# Altium PCB AnalExtend.PcbDoc (part 2 of 3)
Units mm, origin at the board's own origin, x right, y up, seen from the top; angles counter-clockwise.
Board outline 190 x 160 mm, 2 copper layers (Top Layer, Bottom Layer), stack 1.536 mm thick; 277 components, 158 nets, 942 pads, 254 vias.
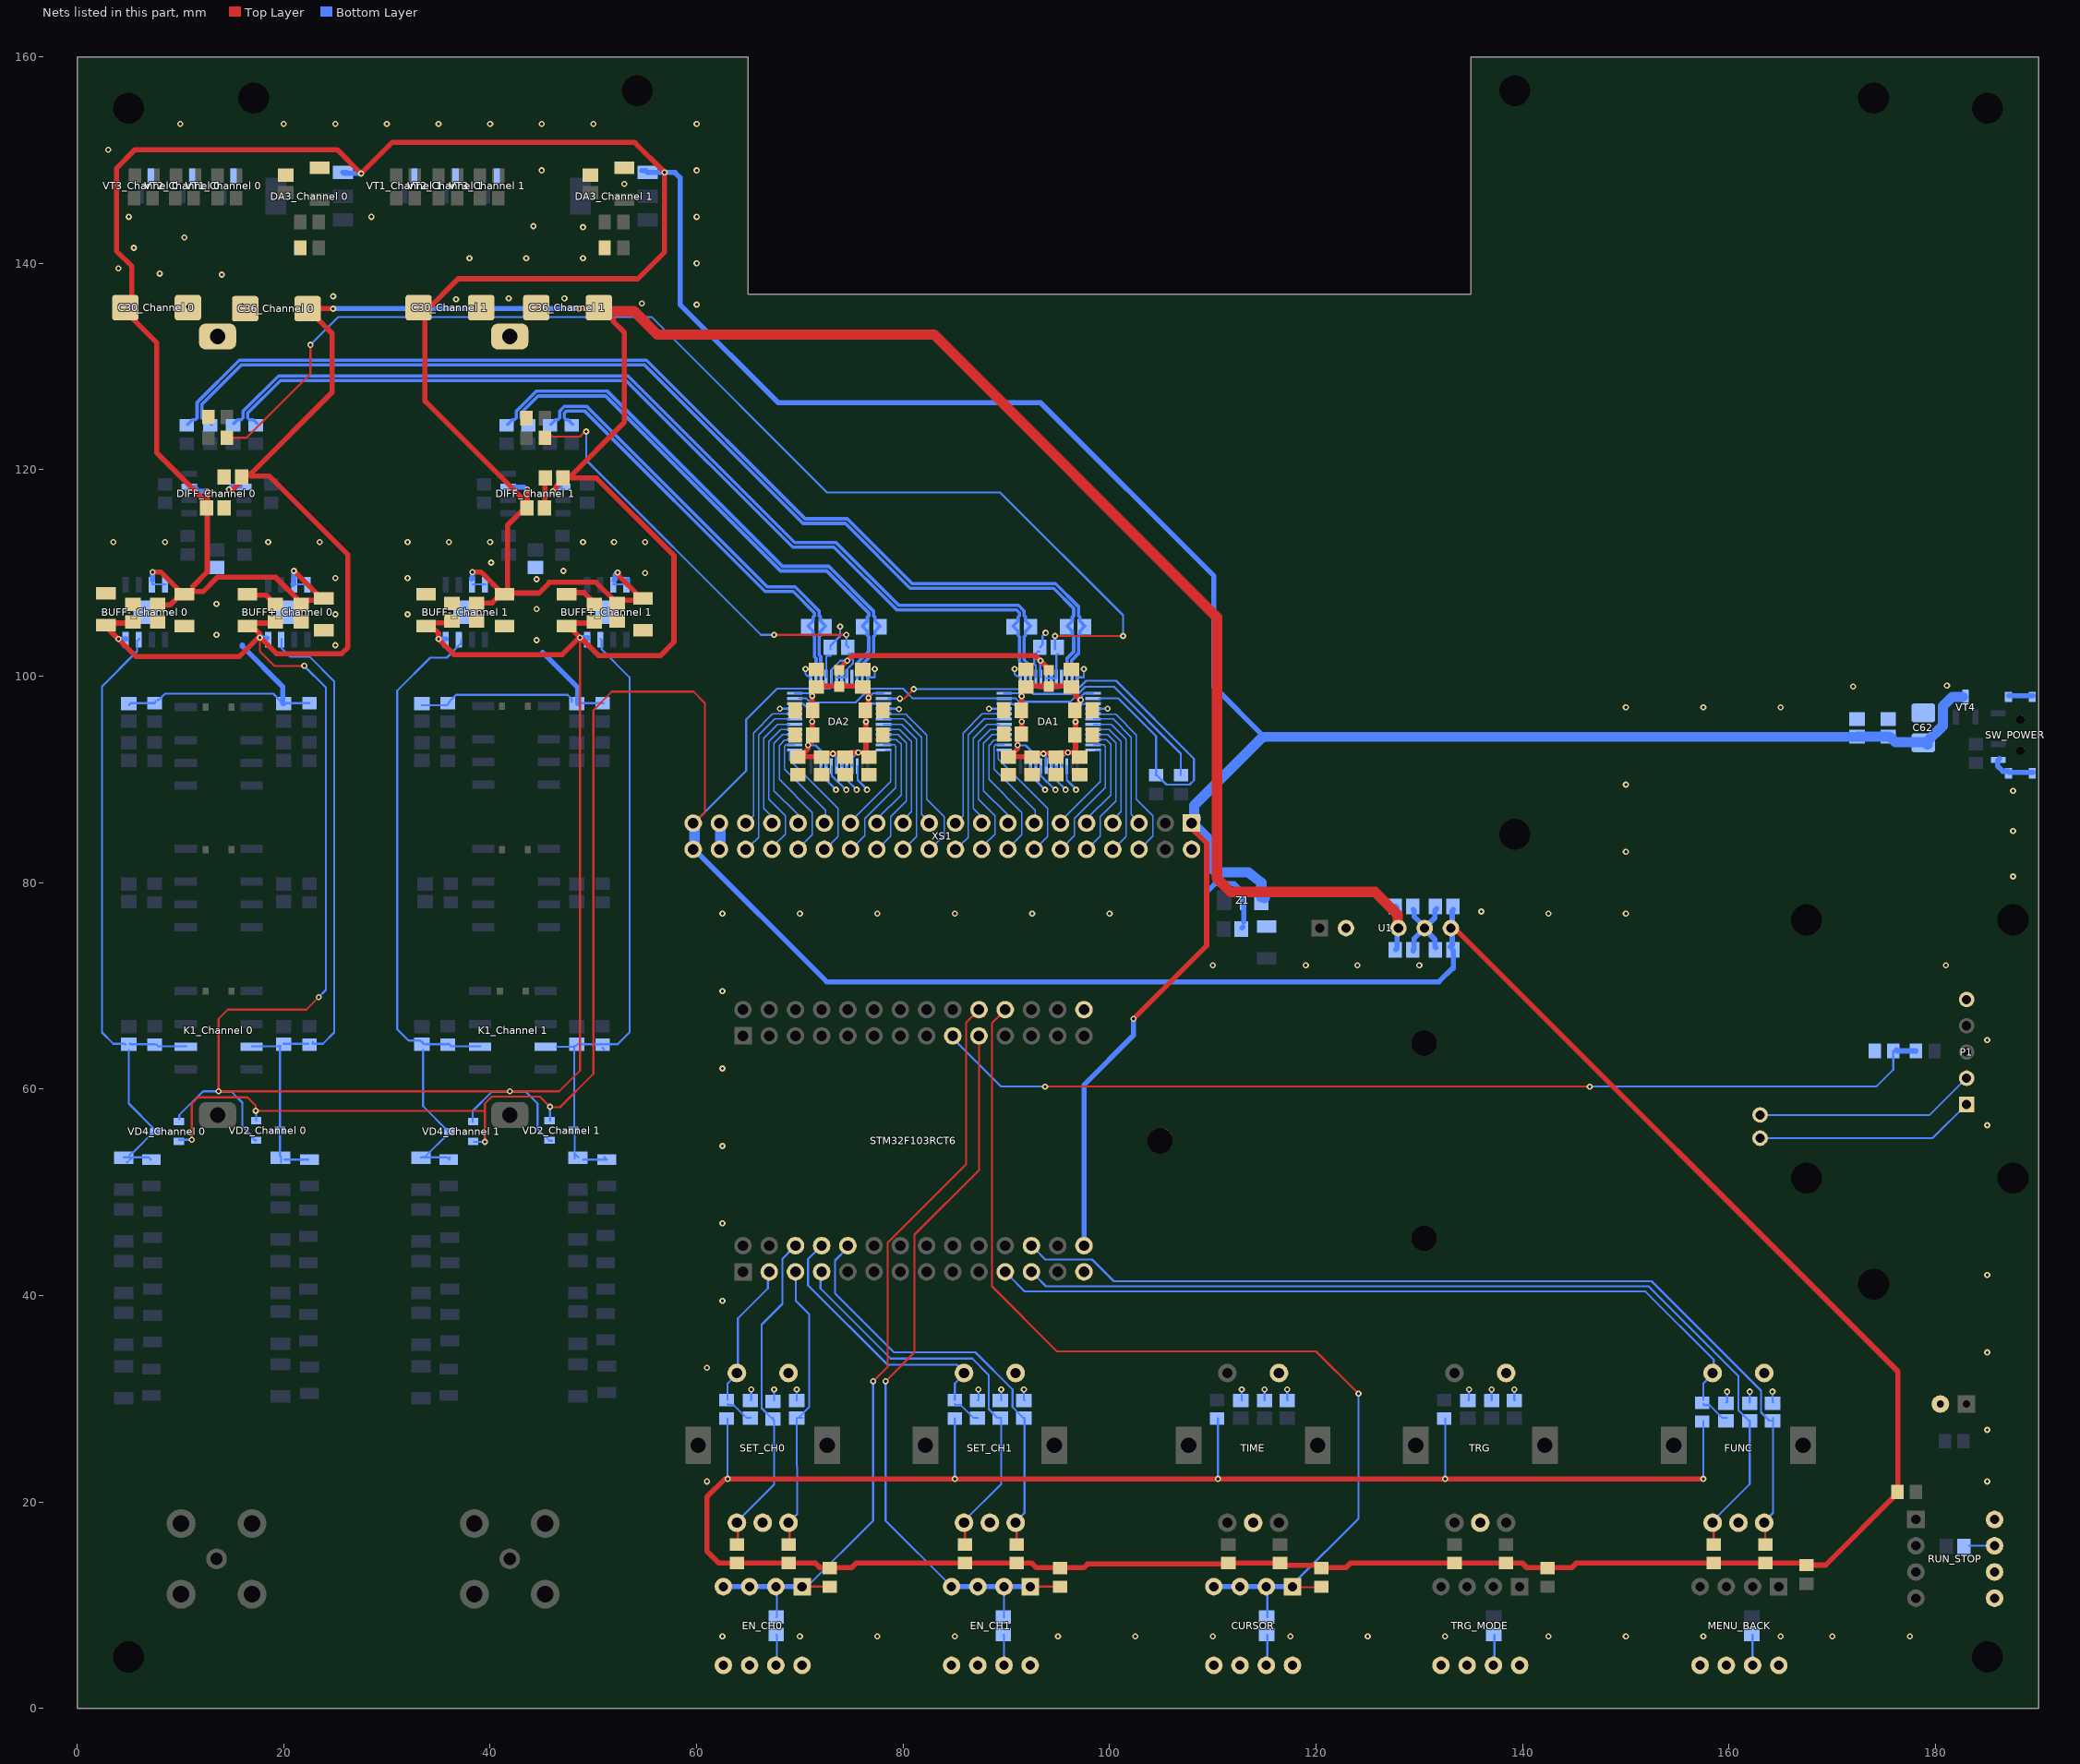
[diagram p2: the nets of this part, all layers, seen from the top]

## Part data
"BNC_Channel 0" "BNC_Channel 1": library part BNC_VERTICAL_THT, "Generic vertical BNC jack, five through-hole terminals"
"BUFF+_Channel 0" "BUFF+_Channel 1" "BUFF-_Channel 0" "BUFF-_Channel 1": "ADI ADA4817-1ARDZ FastFET op amp, RD-8-4 SOIC-8 with EP"
C1 C2 C3 C4 C5 C6 C7 C8 C9 C10 C11 C12 C13 C14 C15 C16 C17 C18 C19 C20 C21 C22 C23 C24 C26 C27 C28 "C29_Channel 0" "C29_Channel 1" "C31_Channel 0" "C31_Channel 1" "C33_Channel 0" "C33_Channel 1" "C35_Channel 0" "C35_Channel 1" "C37_Channel 0" "C37_Channel 1" "C39_Channel 0" "C39_Channel 1" "C41_Channel 0" "C41_Channel 1" "C43_Channel 0" "C43_Channel 1" "C44_Channel 0" "C44_Channel 1" "C50_Channel 0" "C50_Channel 1" "C51_Channel 0" "C51_Channel 1" "C57_Channel 0" "C57_Channel 1" "C58_Channel 0" "C58_Channel 1" "C59_Channel 0" "C59_Channel 1" "C60_Channel 0" "C60_Channel 1" "C61_Channel 0" "C61_Channel 1" C65 C66 C67 C68 C69 C70 C71 C72 C73 C74 C75 C76 C77 C78 C79 C80 C81 C82 C83 C84 C85 "COUTA_Channel 0" "COUTA_Channel 1" "COUTB_Channel 0" "COUTB_Channel 1": library part CAPC2012(0805), Package=0805, Part Number=CAPC2012(0805)
C25 "C32_Channel 0" "C32_Channel 1" "C34_Channel 0" "C34_Channel 1" "C38_Channel 0" "C38_Channel 1" "C40_Channel 0" "C40_Channel 1" "C42_Channel 0" "C42_Channel 1" "C45_Channel 0" "C45_Channel 1" "C46_Channel 0" "C46_Channel 1" "C47_Channel 0" "C47_Channel 1" "C48_Channel 0" "C48_Channel 1" "C49_Channel 0" "C49_Channel 1" "C52_Channel 0" "C52_Channel 1" "C53_Channel 0" "C53_Channel 1" "C54_Channel 0" "C54_Channel 1" "C55_Channel 0" "C55_Channel 1" "C56_Channel 0" "C56_Channel 1": library part 12065A272GAT2A, "Cap Cer MLCC SMD 50V 2700p C0G NP0 1206 2%", Mouser Part Number=581-12065A272G, Package=1206, HelpURL=https://eu.mouser.com/ProductDetail/AVX/12065A272GAT2A?qs=ZdaRgelF1GpUV998NMwU6A%3D%3D, MPN=12065A272GAT2A, Part Number=12065A272GAT2A
"C30_Channel 0" "C30_Channel 1" "C36_Channel 0" "C36_Channel 1": library part CapTantD, Part Number=CapTantD
C62: library part TAJB105K035SNJ, "Tantalum Capacitors - Solid SMD 35V 1uF 10%", MPN=581-TAJB105K035S, HelpURL=https://eu.mouser.com/ProductDetail/KYOCERA-AVX/TAJB105K035SNJ?qs=sGAEpiMZZMtZ1n0r9vR22f0Jgorj1M1uNDk8%2FjXB31s%3D, Mouser Part Number=TAJB105K035SNJ, Part Number=TAJB105K035SNJ
C63 C64: library part CAPC2012(0805), Part Number=CAPC2012(0805)
  C63: Package=0.1u
  C64: Package=1u
CURSOR EN_CH0 EN_CH1 MENU_BACK RUN_STOP TRG_MODE: library part TACT_SMD_ON_DIP8_RAISED, "Custom raised NO tactile switch; pins 1-4 common, pins 5-8 common"
DA1 DA2: "Analog Devices dual 8-bit ADC, 100 MSPS, LQFP-48 ST-48"
"DA3_Channel 0" "DA3_Channel 1": "AMS1117 adjustable voltage regulator, SOT-223; tab = VOUT"
"DIFF_Channel 0" "DIFF_Channel 1": "ADI AD8138ARZ low distortion differential ADC driver, SOIC-8 R-8"
FUNC SET_CH0 SET_CH1 TIME TRG: library part EC11E_ENCODER_SW, "Alps Alpine EC11E vertical incremental encoder with one push-on switch"
"K1_Channel 0" "K1_Channel 1" "K2_Channel 0" "K2_Channel 1" "K3_Channel 0" "K3_Channel 1": "Hongfa HFD4/3-S monostable DPDT relay, standard SMT terminal"
LED_RUN: library part "FYL-5013 GD", Part Number="FYL-5013 GD"
P1: "Pin Header"
R1 R2 "R3_Channel 0" "R3_Channel 1" "R4_Channel 0" "R4_Channel 1" "R5_Channel 0" "R5_Channel 1" "R6_Channel 0" "R6_Channel 1" "R12_Channel 0" "R12_Channel 1" "R13_Channel 0" "R13_Channel 1" "R14_Channel 0" "R14_Channel 1" "R15_Channel 0" "R15_Channel 1" "R16_Channel 0" "R16_Channel 1" "R17_Channel 0" "R17_Channel 1" "R18_Channel 0" "R18_Channel 1" "R19_Channel 0" "R19_Channel 1" "R20_Channel 0" "R20_Channel 1" "R21_Channel 0" "R21_Channel 1" "R27_Channel 0" "R27_Channel 1" "R28_Channel 0" "R28_Channel 1" "R29_Channel 0" "R29_Channel 1" "R30_Channel 0" "R30_Channel 1" R31 R32 R33 R34 R35 R36 R37 R38 R39 R40 R41 R42 R43 R44 R45 R46 R47 R48 R49 R50 R51 R52 R53 R54 R55 "RF+_Channel 0" "RF+_Channel 1" "RF-_Channel 0" "RF-_Channel 1" "RG+_Channel 0" "RG+_Channel 1" "RG-_Channel 0" "RG-_Channel 1" "ROUTA+_Channel 0" "ROUTA+_Channel 1" "ROUTA-_Channel 0" "ROUTA-_Channel 1" "ROUTB+_Channel 0" "ROUTB+_Channel 1" "ROUTB-_Channel 0" "ROUTB-_Channel 1": library part RESC2012(0805), Package=0805, Part Number=RESC2012(0805)
"R7_Channel 0" "R7_Channel 1" "R8_Channel 0" "R8_Channel 1" "R9_Channel 0" "R9_Channel 1" "R10_Channel 0" "R10_Channel 1" "R11_Channel 0" "R11_Channel 1" "R22_Channel 0" "R22_Channel 1" "R23_Channel 0" "R23_Channel 1" "R24_Channel 0" "R24_Channel 1" "R25_Channel 0" "R25_Channel 1" "R26_Channel 0" "R26_Channel 1": library part RESC2012(0805), Package=1206, Part Number=RESC2012(0805)
STM32F103RCT6: library part STM32F103RCT6_MODULE_PBD_2X14, "STM32F103RCT6 core board, 56 pins, two PBD 2x14 sockets"
SW_POWER: "Shou Han MSK12C02 miniature SMD SPDT slide switch, ON-ON, 12 VDC 50 mA; four case tabs are pin 4", LCSC Part Number=C431540, Manufacturer="SHOU HAN", Manufacturer Part Number=MSK12C02
U1: "YLPTEC 2 W isolated DC/DC, 5 V input, +/-3.3 V dual output"
USB-HUB: library part MINGWU_29P3X18P9_MECH, "Mechanical-only Mingwudianzi module; no electrical pins"
"VD1_Channel 0" "VD1_Channel 1" "VD3_Channel 0" "VD3_Channel 1" "VD5_Channel 0" "VD5_Channel 1": library part BAT54J, "Schottky Diode 30V 0,2A  SOD-323-2", Manufacturer Part Number=BAT54J,115, Mouser Part Number=771-BAT54J115, Code_JEDEC=DO-204-AH, ComponentLink1Description="Manufacturer Link", ComponentLink1URL=http://www.fairchildsemi.com/, ComponentLink2Description=Datasheet, ComponentLink2URL=http://www.fairchildsemi.com/ds/1N%2F1N4148.pdf, DatasheetVersion=1997, HelpURL=https://eu.mouser.com/ProductDetail/Nexperia/BAT54J115?qs=me8TqzrmIYVxNBNrx1zKWQ%3D%3D, LatestRevisionDate=17-Jul-2002, LatestRevisionNote="Re-released for DXP Platform.", PackageDescription="Diode, Axial; Body 3.8 x 1.9 mm (LxDia. max), Lead Dia. 0.53 mm (max)", PackageReference=DO-35, Part Number=BAT54J, Price$=0.06, Published=8-Jun-2000, Publisher="Altium Limited"
"VD2_Channel 0" "VD2_Channel 1" "VD4_Channel 0" "VD4_Channel 1": "Nexperia BAV99 dual series diode, SOT23"
"VT1_Channel 0" "VT1_Channel 1" "VT2_Channel 0" "VT2_Channel 1" "VT3_Channel 0" "VT3_Channel 1": library part BC848, HelpURL=http://www.nxp.com/documents/data_sheet/BC848_SER.pdf, Part Number=BC848
VT4: library part PJA3433_R1_00001, "MOSFET 30V P-Channel Enhancement Mode MOSFET-ESD Protected", Digi-Key Part Number=3757-PJA3433_R1_00001CT-ND, Package=SOT-23-3, HelpURL=https://eu.mouser.com/ProductDetail/241-PJA3433_R1_00001, Manufacturer Part Number=PJA3433_R1_00001, Part Number=PJA3433_R1_00001
XS1: "PBD-40 vertical 2x20 2.54 mm female through-hole socket"
Z1: "TDK 22 nF three-terminal T-type EMI filter, 20 V, 1.5 A"
ZL1 ZL2: library part Ferite1608(0603), "ferite bead", Manufacturer Part Number=BLM15PX471SN1D, Package=0402, HelpURL=https://eu.mouser.com/ProductDetail/Murata-Electronics/BLM15PX471SN1D?qs=%2Fha2pyFadugFXr5biOyskwIVnWnam4MScgU55pluOIVbLGfRcJswjw%3D%3D, Mouser Part Number=BLM15PX471SN1D, Part Number=Ferite1608(0603), Price$=0.14

## Free pads (board coordinates)
  round 0 hole 3 unplated: 3(5,5) 3(5,155) 3(17.1,156) 3(54.25,156.7) 3(139.25,84.7) 3(139.25,156.7) 3(167.5,51.4) 3(167.5,76.4) 3(174,41.1) 3(174,156) 3(185,5) 3(185,155) 3(187.5,51.4) 3(187.5,76.4)
  round 1.5 hole 0.9: 4(163,55.25) 4(163,57.5)
  rrect50% 3.6x2.5 hole 1.5 slot 2.6 at 0 deg: 6(13.6,57.5) 6(13.6,132.9) 6(41.9,57.5) 6(41.9,132.9)

## Via types
v1: diameter 0.6, hole 0.3, Top Layer to Bottom Layer, tented both sides, 254 vias

## Nets (pads, with @x,y where several pads share a name; then routed paths per layer and width w, separated by ;. In a path a pad name is that pad's centre, name@x,y a point inside that pad or via, vN(x,y) a via of type N, cw(c..) or ccw(c..) an arc to the next point about the centre after c; other vN are vias at no path point)
3V3: "VD2_Channel 0.2" "VD2_Channel 1.2" "VD4_Channel 0.2" "VD4_Channel 1.2" C23.1 C24.1 DA1.8 DA2.8 R34.2 R35.2 R36.2 R37.2 R38.2 R39.2 R40.2 R41.2 R42.2 R43.2 R44.2 R45.2 R46.2 R47.2 R48.2 R49.2 R50.2 R51.2 R52.2 R53.2 R54.2 U1.6 XS1.39 XS1.40 ZL1.1 ZL2.1 | length 573.8
  Top Layer w0.2: v1(11.1,55.1) 11.1,58.6 11.7,59.2 16.5,59.2 17.3,58.4 v1(17.3,57.9) 39.4,57.9 39.5,58 ; v1(39.5,54.9) 39.5,58 ; XS1.39@59.9,85.8 59.9,85.94 60.8,86.84 60.8,97.4 59.7,98.5 51.8,98.5 50,96.7 50,61.5 46.75,58.25 45.8,58.25 v1(45.8,58.3) 44.827,59.273 40.173,59.273 39.5,58.6 39.5,58
  Top Layer w0.5: ZL2.1@73.7,100.8 73.9,100.8 75.1,102 92.8,102 ZL1.1@94.1,100.7 ; U1.6@133.1,75.9 133.06,75.86 133.06,75.6 U1.6@133.2,75.6 ; U1.6@133.2,75.7 U1.6@133.2,75.6 ; v1(157.5,22.25) v1(132.5,22.25) v1(110.5,22.25) v1(85,22.25) v1(63,22.25) 62.75,22.25 61,20.5 61,15.25 62.15,14.1 R44.2@63.9,14.1 R46.2@68.9,14.1 71.5,14.1 71.95,13.65 75,13.65 75.45,14.1 92.45,14.1 92.9,13.65 97.5,13.65 97.85,14 111.4,14 R40.2@111.5,14.1 R42.2@116.5,14.1 116.725,13.875 120.275,13.875 120.5,13.65 122.9,13.65 123.35,14.1 139.95,14.1 140.4,13.65 144.75,13.65 145.2,14.1 167.3,14.1 R51.2@167.5,13.9 169.35,13.9 176.35,20.9 176.35,32.65 133.4,75.6 U1.6@133.2,75.6
  Top Layer w1: XS1.40@59.75,83.55 XS1.40@59.8,83.5
  Bottom Layer w0.2: 9.9,55.1 v1(11.1,55.1) ; v1(17.3,57.9) 17.35,57.85 17.35,56.95 ; 38.4,54.9 v1(39.5,54.9) ; v1(45.8,58.3) 45.8,57 45.85,56.95 ; XS1.39@59.75,85.79 64.8,90.84 64.8,95.8 67.8,98.8 72.9,98.8 73.05,98.95 73.05,100.621 73.929,101.5 v1(74.6,101.5) ; v1(63,22.25) R45.2@63,28.1 ; v1(85,22.25) R49.2@85,28.1 ; v1(93.3,101.5) 93.271,101.471 93.271,99.979 DA1.8@93.35,99.9 ; v1(110.5,22.25) R41.2@110.5,28.1 ; v1(132.5,22.25) R37.2@132.5,28.1 ; v1(157.5,22.25) R53.2@157.5,27.85
  Bottom Layer w0.5: XS1.40@59.75,83.25 72.6,70.4 131.9,70.4 133.25,71.75 ; C24.1@133,73.8 133.18,73.98 133.18,75.48 133.06,75.6 133.18,75.72 133.18,77.28 C23.1@133.3,77.4 ; C24.1@133.2,73.5 133.3,73.4 133.3,71.7
  Bottom Layer w1: XS1.39@59.75,85.79 59.8,85.74 XS1.40@59.8,83.6
3V3_ADC0: C1.1 C2.1 C3.1 C4.1 C5.1 C6.1 C7.1 C8.1 C19.2 C20.2 DA1.13 DA1.15 DA1.28 DA1.30 DA1.31 DA1.33 DA1.46 DA1.48 ZL1.2 | length 44.5
  Top Layer w0.5: C4.1@90.2,92.2 C5.1@92.4,92.2 ; C4.1@90.6,92.4 90.6,92.5 91.1,93 v1(91.1,93.325) ; v1@91.1,93.525 v1(91.1,93.325) ; C19.2@91.5,96.8 v1(91.5,95.6) 91.5,94.4 91.1,94 v1(91.1,93.325) ; C19.2@91.5,97 91.5,98.6 C2.1@91.9,99 ; C2.1@91.8,99 91.85,99.05 94.05,99.05 ZL1.2@94.1,99.1 ; C5.1@92.5,92.2 92.55,92.15 92.9,92.5 v1(93.6,92.5) 94.4,92.5 94.5,92.4 94.55,92.45 C6.1@94.7,92.3 ; ZL1.2@94.2,99.1 94.25,99.05 96.25,99.05 C1.1@96.3,99 ; C6.1@94.8,92.2 95.2,92.6 v1@95.925,92.6 ; v1@95.975,92.6 96.3,92.6 96.6,92.6 96.775,92.425 C7.1@96.775,92.125 ; C1.1@96.4,98.8 96.4,98.475 v1@97.175,97.7 ; C20.2@96.5,97 C20.2@96.7,96.8 ; C8.1@96.6,94.2 96.7,94.1 96.7,93.2 C7.1@96.7,92.6 ; C8.1@96.7,94.4 96.7,96.7 C20.2@96.8,96.8 ; v1@97.05,97.5 97.25,97.7 v1(97.2,97.7) v1@97.175,97.7
  Bottom Layer w0.2: DA1.13@89.8,98.35 91.175,98.35 v1(91.475,98.05) ; DA1.15@90.435,97.385 90.4,97.35 DA1.15@89.8,97.35 89.85,97.3 90.7,97.3 90.906,97.094 91.5,96.5 v1(91.5,95.6) ; v1(91.1,93.325) 91.121,93.304 91.871,93.304 92.85,92.325 92.85,91.9 DA1.28@92.85,91.3 ; v1(93.6,92.5) 93.6,92.388 93.85,92.138 DA1.30@93.85,91.3 ; DA1.31@94.35,91.3 94.437,91.387 94.437,92.137 94.9,92.6 v1@95.874,92.6 ; DA1.33@95.35,91.3 95.35,92.075 95.618,92.343 v1@95.874,92.6 ; v1@96.075,92.6 v1(95.95,92.6) v1@95.874,92.6 ; v1(96.7,95.575) 96.7,96.675 97.35,97.325 98.375,97.325 DA1.46@98.4,97.35 97.8,97.35 DA1.46@97.765,97.385 ; v1(97.2,97.7) 97.3,97.7 97.3,98.1 97.55,98.35 DA1.48@98.4,98.35
3V3_ADC1: C9.1 C10.1 C11.1 C12.1 C13.1 C14.1 C15.1 C16.1 C21.2 C22.2 DA2.13 DA2.15 DA2.28 DA2.30 DA2.31 DA2.33 DA2.46 DA2.48 ZL2.2 | length 44
  Top Layer w0.5: C12.1@69.9,92.2 C13.1@72.1,92.2 ; C12.1@70.3,92.4 70.3,92.5 70.8,93 v1(70.8,93.325) 71.2,93.725 v1(71.2,95.6) C21.2@71.2,96.8 ; C21.2@71.2,97 71.2,98.6 C10.1@71.6,99 ; C10.1@71.5,99 71.55,99.05 73.75,99.05 ZL2.2@73.8,99.1 ; C13.1@72.2,92.2 72.5,92.5 v1(73.2,92.5) 74.2,92.5 C14.1@74.4,92.3 ; ZL2.2@73.9,99.1 73.95,99.05 75.95,99.05 C9.1@76,99 ; C14.1@74.5,92.2 74.9,92.6 v1@75.625,92.6 ; v1@75.675,92.6 76,92.6 76.3,92.6 76.475,92.425 C15.1@76.475,92.125 ; C9.1@76.1,98.8 76.2,98.8 76.65,98.35 v1(76.65,97.9) 76.65,97.45 76.2,97 C22.2@76.4,96.8 ; C16.1@76.3,94.2 76.4,94.1 76.4,93.2 C15.1@76.4,92.6 ; C16.1@76.4,94.4 76.4,96.7 C22.2@76.5,96.8
  Bottom Layer w0.2: DA2.15@69.5,97.35 DA2.15@70.1,97.35 ; DA2.13@69.5,98.35 70.875,98.35 71.145,98.08 v1(71.203,98.08) ; DA2.15@70.075,97.325 70.325,97.325 70.763,96.888 71.2,96.45 v1(71.2,95.6) ; v1(70.8,93.325) 70.821,93.304 71.521,93.304 72.55,92.275 72.55,91.9 DA2.28@72.55,91.3 ; v1(73.2,92.5) 73.2,92.488 73.55,92.138 DA2.30@73.55,91.3 ; DA2.31@74.05,91.3 74.137,91.387 74.137,92.137 74.6,92.6 v1@75.574,92.6 ; DA2.33@75.05,91.3 75.05,92.075 75.318,92.343 v1@75.574,92.6 ; v1@75.775,92.6 v1(75.65,92.6) v1@75.574,92.6 ; v1(76.4,95.575) 76.4,96.85 76.9,97.35 DA2.46@78.1,97.35 DA2.46@77.5,97.35 ; v1(76.65,97.9) 77.1,98.35 DA2.48@78.1,98.35
5V: "BUFF+_Channel 0.7" "BUFF+_Channel 0.8" "BUFF+_Channel 1.7" "BUFF+_Channel 1.8" "BUFF-_Channel 0.7" "BUFF-_Channel 0.8" "BUFF-_Channel 1.7" "BUFF-_Channel 1.8" "C29_Channel 0.1" "C29_Channel 1.1" "C30_Channel 0.1" "C30_Channel 1.1" "C31_Channel 0.1" "C31_Channel 1.1" "C32_Channel 0.1" "C32_Channel 1.1" "C33_Channel 0.1" "C33_Channel 1.1" "C34_Channel 0.1" "C34_Channel 1.1" "DA3_Channel 0.3" "DA3_Channel 1.3" "DIFF_Channel 0.3" "DIFF_Channel 1.3" C62.1 C63.1 C64.1 STM32F103RCT6.56 VT4.3 XS1.1 Z1.1 | length 473.8
  Top Layer w0.5: v1(7.3,110.1) 8.1,110.1 10.15,108.05 ; 8.4,106.9 9,106.9 10.15,108.05 ; v1(12.6,117.9) 12.6,116.75 ; v1(21,110.2) 21.011,110.2 23.2,108.011 23.2,108 23.55,107.65 23.9,107.65 ; 21.7,107.1 19.2,109.6 13.6,109.6 12.2,108.2 11,108.2 ; 21.8,107 22.15,107.35 23.6,107.35 23.725,107.475 ; v1(38.3,110.1) 39.1,110.1 41.15,108.05 ; 39.5,107.1 40.2,107.1 41.15,108.05 ; 43.4,116.7 43.4,116.95 33.7,126.65 33.7,135.2 33.6,135.2 36.9,138.5 54.3,138.5 56.9,141.1 v1(56.9,148.8) ; 43.6,116.55 41.7,114.65 41.7,108.05 ; 43.6,116.65 43.7,116.75 43.6,116.85 v1(43.6,118.1) ; 45.7,109.1 50.25,109.1 52.25,107.1 52.35,107.1 52.625,107.375 54.2,107.375 54.5,107.675 54.5,107.7 52.3,109.9 v1@52.3,110 ; 45.717,109.027 44.74,108.05 41.7,108.05 ; v1@56.8,148.9 54,151.7 30.5,151.7 v1(27.5,148.7) 25.2,151 5.6,151 3.8,149.2 3.8,141.2 5.3,139.7 5.3,134.7 7.725,132.275 7.725,121.625 12.6,116.75 ; v1(102.3,66.8) 109.4,73.9 109.4,83.82 107.72,85.5 XS1.1@108,85.5 ; 10.15,108.05 10.5,108.05 10.65,108.2 11,108.2 ; 11,108.2 11.2,108.4 11.2,108.7 12.6,110.1 12.6,116.75 ; 41.15,108.05 41.7,108.05
  Bottom Layer w0.2: 7.3,108.9 8.555,108.9 ; 21,108.9 22.305,108.9 ; 38.3,108.9 39.555,108.9 ; 51.9,108.9 53.3,108.9 ; Z1.1@114.8,78.3 114.8,78.7 Z1.1@114.8,79.17
  Bottom Layer w0.5: 7.3,109.3 v1(7.3,110.1) ; 11.4,118.3 11.8,117.9 v1(12.6,117.9) ; 20.9,108.9 21,109 v1(21,110.2) ; 25.75,148.79 26.1,148.79 ; 25.84,148.7 v1(27.5,148.7) ; 38.2,109.4 38.3,109.5 v1(38.3,110.1) ; 42.1,118.3 43.273,118.3 43.473,118.1 v1(43.6,118.1) ; 52,109.3 52.085,109.385 52.085,109.785 v1(52.35,110.05) ; 53.3,108.9 53.3,109.355 ; 54.69,149 55.1,149 ; 55.25,148.8 v1(56.9,148.8) v1@57.1,148.8 ; v1@57.2,148.8 57.9,148.8 58.4,148.3 58.4,136 67.9,126.5 93.3,126.5 110.1,109.7 110.1,99 115,94.1 ; STM32F103RCT6.56@97.51,44.84 97.51,60.41 102.3,65.2 v1(102.3,66.8) ; XS1.1@108.3,86 XS1.1@108.61,86.31 ; C62.1@178.7,93.4 C62.1@178.9,93.6
  Bottom Layer w1: XS1.1@107.8,85.9 108.12,85.9 XS1.1@108.36,86.14 ; XS1.1@108.05,85.75 109.8,84 109.8,81.5 110.3,81 113.4,81 114.7,80 Z1.1@114.7,78.6 ; XS1.1@108.1,86.2 108.2,86.3 108.2,87.5 114.8,94.1 115,94.1 ; Z1.1@114.8,78.7 Z1.1@115,78.5 ; 115,94.099 172.4,94.149 174,94.15 ; C64.1@172.45,94.15 174,94.15 ; C63.1@175.4,94.15 174,94.15 ; C63.1@175.6,94.1 C63.1@176.1,93.6 ; 176.2,93.6 C62.1@178.9,93.6 ; C62.1@179.2,93.4 179.2,93.7 180.7,95.2 180.7,97.1 181.6,98 VT4.3@182.6,98
-3V3: "BUFF+_Channel 0.4" "BUFF+_Channel 1.4" "BUFF-_Channel 0.4" "BUFF-_Channel 1.4" "C35_Channel 0.2" "C35_Channel 1.2" "C36_Channel 0.2" "C36_Channel 1.2" "C37_Channel 0.2" "C37_Channel 1.2" "C38_Channel 0.2" "C38_Channel 1.2" "C39_Channel 0.2" "C39_Channel 1.2" "C40_Channel 0.2" "C40_Channel 1.2" "DIFF_Channel 0.6" "DIFF_Channel 1.6" "VD2_Channel 0.1" "VD2_Channel 1.1" "VD4_Channel 0.1" "VD4_Channel 1.1" C27.2 C28.2 U1.4 | length 468
  Top Layer w0.2: v1(17.7,103.75) 17.7,102.4 19.1,101 v1(22,101) ; v1(23.4,68.9) 22.2,67.7 14.6,67.7 13.7,66.8 v1(13.7,59.8) v1(41.9,59.8) 46.7,59.8 48.7,61.8 v1@48.7,103.7 ; 36.025,105.3 36.2,105.3 ; 49.65,104.95 49.85,105.15
  Top Layer w0.5: 2.55,105.3 2.9,104.95 ; 3.1,104.7 3.1,104.5 v1(4,103.6) ; 3.1,105 3.25,105.15 5.2,105.15 5.4,105.35 ; v1@4.1,103.5 5.7,101.9 15.7,101.9 17.55,103.75 v1(17.7,103.75) 17.7,104.1 16.85,104.95 16.5,104.95 ; v1(14.7,118.1) 15.1,118.1 15.8,118.8 ; 16.75,105.15 19,105.15 19.2,105.35 ; v1@17.8,103.7 19.313,102.187 25.6,102.187 ; 22.85,135.375 23.138,135.663 ; 23,134.9 23.4,134.5 23.688,134.213 24.7,133.2 24.7,127.5 16.8,119.6 16.8,119.4 18.6,119.4 26.223,111.777 26.223,102.798 25.613,102.187 ; 23.2,135.4 23.5,135.7 23.6,135.6 v1(24.8,135.6) ; 34,105.1 34.05,105.1 34.075,105.075 ; v1(35,103.6) 35,104.15 34.075,105.075 ; v1@35.1,103.5 36.5,102.1 47,102.1 48.65,103.75 v1(48.7,103.75) ; 36.025,105.3 35.9,105.175 34.175,105.175 34.075,105.075 ; v1@46.1,117.967 46.427,118.294 46.427,118.427 47.1,119.1 47.1,119.2 ; v1(48.6,135.6) 49.9,135.6 50,135.5 ; 50.1,105.2 50.05,105.15 49.85,105.15 47.7,105.15 47.5,104.95 47.85,104.95 47.8,104.9 47.8,104.65 v1(48.7,103.75) ; 50.1,135.4 50,135.5 ; 51.2,135.1 51.375,135.1 51.95,134.525 51.95,134.35 53,133.3 53,124.6 47.6,119.2 50.3,119.2 57.8,111.7 57.8,103.3 56.5,102 50.5,102 48.75,103.75 v1(48.7,103.75) ; 52.025,135.5 50,135.5
  Top Layer w1: 51.3,135.4 51.35,135.35 53.95,135.35 56.2,133.1 83,133.1 110.4,105.7 110.4,80.427 111.727,79.1 125.7,79.1 127.896,76.904 127.896,75.704 U1.4@128,75.6
  Bottom Layer w0.2: 9.9,57.1 9.9,57.5 12.2,59.8 v1(13.7,59.8) 14.9,59.8 16,58.7 16,56.4 16.95,55.45 16.95,55.3 17.2,55.05 17.35,55.05 ; v1(22,101) 24.1,98.9 24.1,69.6 v1(23.4,68.9) ; 38.3,56.85 38.3,57.9 40.2,59.8 v1(41.9,59.8) 43.4,59.8 44.6,58.6 44.6,56.15 45.75,55 46,55
  Bottom Layer w0.5: v1(4,103.6) 4.745,103.6 ; v1(14.7,118.1) 15,118.4 15.8,118.4 ; v1(17.7,103.75) 17.75,103.7 18.4,103.7 ; v1(24.8,135.6) v1(48.6,135.6) ; v1(35,103.6) 35.745,103.6 ; v1(46.075,117.9) 46.075,117.95 46.525,118.4 46.8,118.4 ; v1(48.7,103.75) 49.45,103.75 49.5,103.7 ; C28.2@127.7,73.5 127.84,73.64 127.84,75.46 U1.4@127.8,75.5 ; C27.2@127.7,77.7 127.84,77.56 U1.4@127.84,75.86
ADC0_D0A: DA1.37 XS1.11 | length 8.9
  Bottom Layer w0.127: XS1.11@95.5,86.1 95.5,86.2 99.1,89.8 99.1,92.8 DA1.37@98.6,92.8
  Bottom Layer w0.2: XS1.11@95.2,85.9 95.21,85.91 XS1.11@95.31,85.79
ADC0_D0B: DA1.24 XS1.14 | length 12.1
  Bottom Layer w0.127: DA1.24@89.2,92.825 89.2,92 94,87.2 94,84.48 XS1.14@92.77,83.25
ADC0_D1A: DA1.38 XS1.12 | length 13
  Bottom Layer w0.127: XS1.12@95.3,83.3 95.36,83.3 96.6,84.54 96.6,86.052 ; 96.6,86.1 96.6,86.2 99.6,89.2 99.6,93.2 99.45,93.35 98.45,93.35 DA1.38@98.4,93.35 DA1.38@98.45,93.4
ADC0_D1B: DA1.23 XS1.13 | length 10.1
  Bottom Layer w0.127: DA1.23@89.8,93.35 88.95,93.35 88.8,93.2 88.8,91 92.77,87.03 XS1.13@92.77,85.79
ADC0_D2A: DA1.39 XS1.9 | length 11.1
  Bottom Layer w0.127: XS1.9@97.9,85.7 97.9,85.9 XS1.9@97.9,86.1 ; XS1.9@97.96,85.9 98.16,86.1 XS1.9@97.9,86.1 ; DA1.39@98.45,93.8 DA1.39@98.4,93.85 98.45,93.85 99.65,93.85 100.1,93.4 100.1,88.5 97.9,86.3 XS1.9@97.9,86.1
ADC0_D2B: DA1.22 XS1.16 | length 13.4
  Bottom Layer w0.127: DA1.22@89.6,93.8 89.59,93.81 88.81,93.81 88.3,93.3 88.3,90 91.5,86.8 91.5,84.66 90.23,83.39 XS1.16@90.23,83.25
ADC0_D3A: DA1.40 XS1.10 | length 14
  Bottom Layer w0.127: XS1.10@97.85,83.25 99.1,84.5 99.1,86.4 100.6,87.9 100.6,93.55 99.8,94.35 DA1.40@98.4,94.35
ADC0_D3B: DA1.21 XS1.15 | length 10.5
  Bottom Layer w0.127: DA1.21@89.8,94.35 88.65,94.35 87.8,93.5 87.8,88.9 90.094,86.606 90.094,86.294 XS1.15@90.1,86.3
ADC0_D4A: DA1.41 XS1.7 | length 11.4
  Bottom Layer w0.127: DA1.41@98.4,94.85 99.95,94.85 101.1,93.7 101.1,86.9 100.39,86.19 XS1.7@100.39,85.79
ADC0_D4B: DA1.20 XS1.18 | length 14.6
  Bottom Layer w0.127: XS1.18@87.8,83.2 87.8,83.6 88.9,84.7 88.9,86.5 87.3,88.1 87.3,93.7 88.45,94.85 DA1.20@89.8,94.85
ADC0_D5A: DA1.42 XS1.8 | length 15
  Bottom Layer w0.127: DA1.42@98.4,95.35 100.15,95.35 101.6,93.9 101.6,84.46 XS1.8@100.39,83.25
ADC0_D5B: DA1.19 XS1.17 | length 11.7
  Bottom Layer w0.127: XS1.17@87.69,85.79 87.69,86.31 86.8,87.2 86.8,94 88.15,95.35 89.25,95.35 DA1.19@89.3,95.3
ADC0_D6A: DA1.43 XS1.5 | length 13.1
  Bottom Layer w0.127: DA1.43@98.4,95.85 100.35,95.85 102.1,94.1 102.1,86.62 XS1.5@102.93,85.79
ADC0_D6B: DA1.18 XS1.20 | length 15
  Bottom Layer w0.127: XS1.20@85.2,83.6 85.5,83.6 86.3,84.4 86.3,94.3 87.85,95.85 89.25,95.85 DA1.18@89.3,95.8
ADC0_D7A: DA1.44 XS1.6 | length 17.4
  Bottom Layer w0.127: DA1.44@98.4,96.35 98.441,96.31 100.59,96.31 102.6,94.3 102.6,88.1 104.2,86.5 104.2,84.5 103,83.3 XS1.6@102.8,83.3
ADC0_D7B: DA1.17 XS1.19 | length 13.9
  Bottom Layer w0.127: XS1.19@85.2,85.7 85.15,85.75 85.15,85.79 85.15,85.85 85.8,86.5 85.8,94.5 87.65,96.35 DA1.17@89.8,96.35
ADC0_REF: "R29_Channel 0.1" C17.1 DA1.5 DA1.6 DA1.7 | length 118.7
  Top Layer w0.2: 14.5,123.1 16.4,123.1 22.6,129.3 v1(22.6,132.1) ; v1(94.7,103.9) v1(101.3,103.9)
  Bottom Layer w0.2: v1(22.6,132.1) 25.3,134.8 55.625,134.8 72.625,117.8 89.4,117.8 101.3,105.9 v1(101.3,103.9) ; DA1.7@93.9,99.8 DA1.6@94.3,99.8 ; DA1.6@94.35,99.9 94.35,99.85 DA1.6@94.3,99.8 ; C17.1@94.7,102.6 v1(94.7,103.9) ; DA1.5@94.85,99.9 DA1.5@94.85,99.85 ; C17.1@95,102.2 94.85,102.05 DA1.5@94.85,99.85 ; DA1.6@94.3,99.8 94.8,99.8 DA1.5@94.85,99.85
ADC1_D0A: DA2.37 XS1.27 | length 8.7
  Bottom Layer w0.127: XS1.27@75.2,86.1 75.2,86.2 78.8,89.8 78.8,92.8 DA2.37@78.3,92.8
ADC1_D0B: DA2.24 XS1.30 | length 12
  Bottom Layer w0.127: DA2.24@68.9,92.8 69,92.7 69,91.9 73.7,87.2 73.7,84.48 XS1.30@72.47,83.25
ADC1_D1A: DA2.38 XS1.28 | length 13
  Bottom Layer w0.127: XS1.28@75,83.3 75.06,83.3 76.3,84.54 76.3,86.052 ; 76.3,86.1 76.3,86.2 79.3,89.2 79.3,93.2 79.15,93.35 78.15,93.35 DA2.38@78.1,93.35 DA2.38@78.15,93.4
ADC1_D1B: DA2.23 XS1.29 | length 10.1
  Bottom Layer w0.127: DA2.23@69.5,93.35 68.65,93.35 68.5,93.2 68.5,91 72.47,87.03 XS1.29@72.47,85.79
ADC1_D2A: DA2.39 XS1.25 | length 11.1
  Bottom Layer w0.127: XS1.25@77.6,85.7 77.6,85.9 XS1.25@77.6,86.1 ; XS1.25@77.66,85.9 77.86,86.1 XS1.25@77.6,86.1 ; DA2.39@78.15,93.8 DA2.39@78.1,93.85 78.15,93.85 79.35,93.85 79.8,93.4 79.8,88.5 77.6,86.3 XS1.25@77.6,86.1
ADC1_D2B: DA2.22 XS1.32 | length 13.4
  Bottom Layer w0.127: DA2.22@69.3,93.8 69.29,93.81 68.51,93.81 68,93.3 68,90 71.2,86.8 71.2,84.66 69.93,83.39 XS1.32@69.93,83.25
ADC1_D3A: DA2.40 XS1.26 | length 14
  Bottom Layer w0.127: XS1.26@77.55,83.25 78.8,84.5 78.8,86.4 80.3,87.9 80.3,93.55 79.5,94.35 DA2.40@78.1,94.35
ADC1_D3B: DA2.21 XS1.31 | length 10.5
  Bottom Layer w0.127: DA2.21@69.5,94.35 68.35,94.35 67.5,93.5 67.5,88.9 69.794,86.606 69.794,86.294 XS1.31@69.8,86.3
ADC1_D4A: DA2.41 XS1.23 | length 11.4
  Bottom Layer w0.127: DA2.41@78.1,94.85 79.65,94.85 80.8,93.7 80.8,86.9 80.09,86.19 XS1.23@80.09,85.79
ADC1_D4B: DA2.20 XS1.34 | length 14.6
  Bottom Layer w0.127: XS1.34@67.5,83.2 67.5,83.6 68.6,84.7 68.6,86.5 67,88.1 67,93.7 68.15,94.85 DA2.20@69.5,94.85
ADC1_D5A: DA2.42 XS1.24 | length 15
  Bottom Layer w0.127: DA2.42@78.1,95.35 79.85,95.35 81.3,93.9 81.3,84.46 XS1.24@80.09,83.25
ADC1_D5B: DA2.19 XS1.33 | length 11.7
  Bottom Layer w0.127: XS1.33@67.39,85.79 67.39,86.31 66.5,87.2 66.5,94 67.85,95.35 68.95,95.35 DA2.19@69,95.3
ADC1_D6A: DA2.43 XS1.21 | length 13.1
  Bottom Layer w0.127: DA2.43@78.1,95.85 80.05,95.85 81.8,94.1 81.8,86.62 XS1.21@82.63,85.79
ADC1_D6B: DA2.18 XS1.36 | length 15
  Bottom Layer w0.127: XS1.36@64.9,83.6 65.2,83.6 66,84.4 66,94.3 67.55,95.85 68.95,95.85 DA2.18@69,95.8
ADC1_D7A: DA2.44 XS1.22 | length 17.5
  Bottom Layer w0.127: DA2.44@78.1,96.35 78.141,96.31 80.29,96.31 82.3,94.3 82.3,88.1 84,86.4 84,84.6 82.7,83.3 XS1.22@82.5,83.3
ADC1_D7B: DA2.17 XS1.35 | length 13.9
  Bottom Layer w0.127: XS1.35@64.9,85.7 64.85,85.75 64.85,85.79 64.85,85.85 65.5,86.5 65.5,94.5 67.35,96.35 DA2.17@69.5,96.35
ADC1_REF: "R29_Channel 1.1" C18.1 DA2.5 DA2.6 DA2.7 | length 44.3
  Top Layer w0.2: 45.65,123.45 45.7,123.5 ; 45.7,123.4 45.75,123.45 45.9,123.3 46,123.2 48.7,123.2 49.2,123.7 v1(49.3,123.7) ; v1(67.5,104) v1(74.5,104) v1@74.6,104
  Bottom Layer w0.2: v1(49.3,123.7) 49.3,120.925 66.225,104 v1(67.5,104) ; DA2.7@73.6,99.9 DA2.5@74.55,99.9 74.55,100.65 74.818,100.918 75.152,101.252 75.152,102.148 75.1,102.2 C18.1@74.7,102.2 ; v1(74.5,104) 74.5,103 C18.1@74.7,102.8
ANALOG_VBAT: R32.2 R33.1 STM32F103RCT6.17 | length 97.8
  Top Layer w0.2: v1(93.75,60.25) v1(146.5,60.25)
  Bottom Layer w0.2: STM32F103RCT6.17@84.75,65 84.65,65 85,64.65 85.1,64.65 89.5,60.25 v1(93.75,60.25) ; v1(146.5,60.25) 174.25,60.25 175.9,61.9 R33.1@175.9,63.7
  Bottom Layer w0.5: R33.1@176.2,63.8 176.2,63.75 176.25,63.7 R32.2@178.1,63.7
CH0_A: C75.1 R44.1 SET_CH0.A STM32F103RCT6.34 | length 31.8
  Top Layer w0.2: R44.1@64,15.9 SET_CH0.A@64,18
  Bottom Layer w0.2: SET_CH0.A@64,18 64,18.2 67.5,21.7 67.5,27.9 C75.1@67.4,28 ; C75.1@67.4,28.15 67.25,28.15 66.3,29.1 66.3,37.2 68.3,39.2 68.3,43.57 69.3,44.57 STM32F103RCT6.34@69.3,44.6
CH0_B: C76.1 R46.1 SET_CH0.B STM32F103RCT6.33 | length 28.3
  Top Layer w0.2: R46.1@69,15.9 SET_CH0.B@69,18
  Bottom Layer w0.2: SET_CH0.B@69,18 69,18.097 69.742,18.839 69.692,28.091 69.75,28.15 C76.1@69.85,28.15 ; STM32F103RCT6.33@69.6,42.4 69.6,39.5 70.9,38.2 70.9,29.2 C76.1@69.85,28.15 ; C76.1@70.2,28.15 C76.1@69.85,28.15
CH0_ENC: C77.2 R45.1 SET_CH0.D STM32F103RCT6.31 | length 16.3
  Bottom Layer w0.2: R45.1@63,29.5 63.1,29.4 63.6,29.4 64.85,28.15 C77.2@65.25,28.15 ; R45.1@63,29.9 63,31.5 63.75,32.25 SET_CH0.D@64,32.25 ; SET_CH0.D@64,32.5 64,37.8 66.9,40.7 STM32F103RCT6.31@66.9,41.9
Ch0A_OUT+: "COUTA_Channel 0.1" "ROUTA+_Channel 0.2" DA1.2 | length 106.6
  Bottom Layer w0.324: 10.7,124.4 11.138,124.838 11.435,124.838 11.625,125.028 11.625,126.51 15.713,130.598 55.146,130.598 70.492,115.252 74.587,115.252 80.864,108.975 94.76,108.975 96.975,106.76 96.975,105.861 97.112,105.725 97.112,105.338 97.6,104.85 97.112,104.362 97.112,103.975 96.975,103.839 96.975,102.194 96.308,101.527 DA1.2@96.308,100.525
Ch0A_OUT-: "COUTA_Channel 0.2" "ROUTA-_Channel 0.2" DA1.3 | length 105.1
  Bottom Layer w0.324: 13,124.4 12.562,124.838 12.265,124.838 12.075,125.028 12.075,126.323 15.9,130.148 54.959,130.148 70.305,114.802 74.4,114.802 80.677,108.524 94.573,108.524 96.525,106.573 96.525,105.861 96.388,105.725 96.388,105.338 95.9,104.85 96.388,104.362 96.388,103.975 96.525,103.839 96.525,102.381 95.857,101.713 DA1.3@95.857,100.507
Ch0B_OUT+: "COUTB_Channel 0.1" "ROUTB+_Channel 0.2" DA1.11 | length 93.3
  Bottom Layer w0.324: 17.4,124.5 17.062,124.838 16.715,124.838 16.525,125.028 16.525,125.486 19.687,128.648 53.159,128.648 69.305,112.502 73.3,112.502 79.392,106.409 90.995,106.409 91.275,106.13 91.275,105.861 91.138,105.725 91.138,105.338 90.65,104.85 91.138,104.362 91.138,103.975 91.275,103.839 91.275,101.413 91.875,100.813 91.875,100.525 DA1.11@91.862,100.512
Ch0B_OUT-: "COUTB_Channel 0.2" "ROUTB-_Channel 0.2" DA1.10 | length 94.9
  Bottom Layer w0.2: 92.2,104.6 92.2,104.7
  Bottom Layer w0.324: 15.2,124.5 15.538,124.838 15.885,124.838 16.075,125.028 16.075,125.672 19.501,129.098 53.346,129.098 69.492,112.952 73.487,112.952 79.579,106.86 91.182,106.86 91.725,106.316 91.725,105.861 91.862,105.725 91.862,105.338 92.35,104.85 92.2,104.7 91.862,104.362 91.862,103.975 91.725,103.839 91.725,101.6 92.325,101 92.325,100.525 DA1.10@92.338,100.512
CH1_A: C79.1 R48.1 SET_CH1.A STM32F103RCT6.35 | length 39.7
  Top Layer w0.2: R48.1@86,15.9 SET_CH1.A@86,18
  Bottom Layer w0.2: STM32F103RCT6.35@72,42.2 72,40.7 78.8,33.9 86.7,33.9 88.3,32.3 88.3,29 89.15,28.15 C79.1@89.4,28.15 C79.1@89.5,28.15 ; SET_CH1.A@86,18 86,18.25 89.5,21.75 C79.1@89.5,28
CH1_B: C80.1 R50.1 SET_CH1.B STM32F103RCT6.38 | length 42.2
  Top Layer w0.2: R50.1@91,15.9 SET_CH1.B@91,18
  Bottom Layer w0.2: STM32F103RCT6.38@74.6,44.9 74.6,44.6 73.4,43.4 73.4,40.2 79.1,34.5 87,34.5 90.6,30.9 90.6,29.2 91.65,28.15 91.75,28.15 91.75,18.947 90.803,18 SET_CH1.B@90.75,18
CH1_ENC: C81.2 R49.1 SET_CH1.D STM32F103RCT6.36 | length 28.8
  Bottom Layer w0.2: STM32F103RCT6.36@72.1,44.8 72.07,44.8 70.8,43.53 70.8,41 78.5,33.3 85.2,33.3 SET_CH1.D@86,32.5 ; R49.1@85,29.5 85.1,29.4 85.6,29.4 86.85,28.15 C81.2@87.25,28.15 ; R49.1@85,29.9 85,31.5 85.75,32.25 SET_CH1.D@86,32.25
Ch1A_OUT+: "COUTA_Channel 1.1" "ROUTA+_Channel 1.2" DA2.2 | length 52.7
  Bottom Layer w0.324: 41.7,124.4 42.138,124.838 42.335,124.838 42.525,125.028 42.525,125.672 44.451,127.598 51.363,127.598 68.309,110.652 72.789,110.652 77.125,106.316 77.125,105.861 77.262,105.725 77.262,105.338 77.75,104.85 77.262,104.362 77.262,103.975 77.125,103.839 77.125,102.218 76.043,101.136 DA2.2@76.043,100.488
Ch1A_OUT-: "COUTA_Channel 1.2" "ROUTA-_Channel 1.2" DA2.3 | length 51.8
  Bottom Layer w0.324: 43.8,124.4 43.362,124.838 43.165,124.838 42.975,125.028 42.975,125.486 44.637,127.148 51.177,127.148 68.123,110.202 72.603,110.202 76.675,106.13 76.675,105.861 76.538,105.725 76.538,105.338 76.05,104.85 76.538,104.362 76.538,103.975 76.675,103.839 76.675,102.405 75.592,101.322 75.592,100.518 75.55,100.476 DA2.3@75.55,99.9
Ch1B_OUT+: "COUTB_Channel 1.1" "ROUTB+_Channel 1.2" DA2.11 | length 40.2
  Bottom Layer w0.324: 48,124.4 47.562,124.838 47.365,124.838 47.175,125.028 47.175,125.486 47.365,125.675 49.169,125.675 66.643,108.202 69.353,108.202 71.425,106.13 71.425,105.861 71.288,105.725 71.288,105.338 70.8,104.85 71.288,104.362 71.288,103.975 71.425,103.839 71.425,101.879 71.575,101.729 71.575,100.525 DA2.11@71.562,100.512
Ch1B_OUT-: "COUTB_Channel 1.2" "ROUTB-_Channel 1.2" DA2.10 | length 41.7
  Bottom Layer w0.324: 45.9,124.4 46.338,124.838 46.535,124.838 46.725,125.028 46.725,125.672 47.178,126.126 49.356,126.126 66.83,108.652 69.539,108.652 71.875,106.316 71.875,105.861 72.012,105.725 72.012,105.338 72.5,104.85 72.012,104.362 72.012,103.975 71.875,103.839 71.875,102.066 72.025,101.916 72.025,100.525 DA2.10@72.038,100.512
"CH+_Channel 0": "BUFF+_Channel 0.3" "C44_Channel 0.1" "C49_Channel 0.2" "K1_Channel 0.6" "R11_Channel 0.2" "R13_Channel 0.2" "VD2_Channel 0.3" | length 62.8
  Bottom Layer w0.2: 16.925,64.15 19.65,64.15 ; 19.6,64.2 19.65,64.15 ; 19.7,53.5 19.65,53.55 19.65,56 19.65,64.15 ; 19.7,64.2 19.65,64.15 ; 19.75,52.9 19.75,53.4 ; 19.8,103.6 19.8,102.7 20.6,101.9 22.5,101.9 24.9,99.5 24.9,65.5 23.8,64.4 22.95,64.4 22.8,64.55 22.8,64.4 ; 20,64.4 22.4,64.4 ; 20.1,53.2 20.125,53.175 22.4,53.175
"CH+_Channel 1": "BUFF+_Channel 1.3" "C44_Channel 1.1" "C49_Channel 1.2" "K1_Channel 1.6" "R11_Channel 1.2" "R13_Channel 1.2" "VD2_Channel 1.3" | length 61.1
  Bottom Layer w0.2: 46.4,64.1 48.15,64.1 ; 48.15,56 48.15,64.1 ; 48.2,53.25 48.2,53.75 ; 48.2,55.9 48.2,53.75 ; 48.2,64.2 48.15,64.15 48.15,64.1 ; 48.25,64.15 48.45,64.35 51,64.35 52.35,64.35 53.5,65.5 53.5,99.9 50.8,102.6 50.8,103.5 50.7,103.6 ; 48.55,53.4 48.2,53.75 ; 49,53.2 49.025,53.175 51.3,53.175 51.05,53.425 ; 50.9,64 51.05,63.85
"CH-_Channel 0": "BUFF-_Channel 0.3" "C43_Channel 0.1" "C56_Channel 0.2" "K1_Channel 0.3" "R12_Channel 0.2" "R26_Channel 0.2" "VD4_Channel 0.3" | length 63.6
  Bottom Layer w0.2: 4.5,53.4 5.2,53.4 ; 4.7,64.3 4.6,64.4 3.5,64.4 2.4,65.5 2.4,99 5.815,102.415 5.815,103.4 6.015,103.6 ; 4.85,52.9 5.35,53.4 6.925,53.4 7.15,53.175 ; 5,63.8 5,58.6 7.45,56.15 ; 5.1,53.6 5.1,53.65 5.35,53.9 5.45,53.9 7.45,55.9 7.6,55.9 7.8,55.9 ; 5.1,64.4 5.15,64.35 7.5,64.35 ; 7.5,55.7 7.6,55.7 7.5,55.8 ; 7.7,64.3 7.85,64.15 10.575,64.15
"CH-_Channel 1": "BUFF-_Channel 1.3" "C43_Channel 1.1" "C56_Channel 1.2" "K1_Channel 1.3" "R12_Channel 1.2" "R26_Channel 1.2" "VD4_Channel 1.3" | length 66.1
  Bottom Layer w0.2: 33.3,53.4 33.65,53.4 36.05,55.8 35.95,55.9 ; 33.4,53.4 35.825,53.4 36.05,53.175 ; 33.4,64.6 33.65,64.35 36,64.35 ; 33.5,63.8 33.5,58.35 35.95,55.9 ; 33.5,64.4 33.2,64.7 32.1,64.7 31,65.8 31,98.6 34.2,101.8 35.8,101.8 37.2,103.2 37.2,103.5 ; 36,53.3 36.1,53.4 ; 36,55.9 35.95,55.9 ; 36,64.4 36.25,64.15 39.075,64.15 ; 36.1,55.9 35.95,55.9
CLK_A: DA1.47 DA2.47 R1.2 | length 51
  Top Layer w0.2: v1(79.7,97.825) 80.1,97.825 v1(81.025,98.75)
  Bottom Layer w0.2: DA2.47@78.6,97.825 78.613,97.838 79.687,97.838 v1(79.7,97.825) ; v1(81.025,98.75) 92.125,98.75 92.6,98.275 96.45,98.275 97.725,99.55 100.625,99.55 108.17,92.005 108.17,89.92 107.75,89.5 105.5,89.5 104.6,90.4 R1.2@104.5,90.4 104.45,90.45 104.5,90.5 104.5,94.2 100.85,97.85 99.05,97.85 DA1.47@99,97.8
CLK_B: DA1.14 DA2.14 R2.2 | length 43.6
  Bottom Layer w0.2: DA2.14@69.95,97.85 70.625,97.85 71.025,97.45 75.4,97.45 76.75,98.8 80,98.8 80.95,97.85 DA1.14@89.8,97.85 90.9,97.85 91.227,97.523 96.178,97.523 97.63,98.975 100.425,98.975 106.9,92.5 R2.2@106.9,90.4
CURSOR: C70.1 CURSOR.1 CURSOR.2 CURSOR.3 CURSOR.4 R39.1 STM32F103RCT6.22 | length 101.3
  Top Layer w0.2: STM32F103RCT6.22@89.8,67.6 89.79,67.6 88.6,66.41 88.6,40.9 94.9,34.6 120,34.6 v1(124.1,30.5) ; CURSOR.1@117.81,11.81 117.87,11.75 R39.1@120.5,11.75
  Bottom Layer w0.2: C70.1@115.25,8.85 115.27,8.87 115.27,11.48 CURSOR.2@115.25,11.5 ; CURSOR.1@117.81,11.81 117.81,12.11 124.1,18.4 v1(124.1,30.5)
  Bottom Layer w0.5: CURSOR.4@110.19,11.81 112.73,11.81 115.27,11.81 CURSOR.1@117.81,11.81
D+: P1.2 pad.4@163,57.5 | length 21.4
  Top Layer w0.2: P1.2@183,61.08 P1.2@183.04,61.04
  Bottom Layer w0.2: pad.4@163,57.5 179.42,57.5 182.75,60.83 P1.2@182.75,61
D-: P1.1 pad.4@163,55.25 | length 21.4
  Bottom Layer w0.2: pad.4@163,55.25 164.25,55.25 179.71,55.25 P1.1@183,58.54
EN_CH0: C74.1 EN_CH0.1 EN_CH0.2 EN_CH0.3 EN_CH0.4 R43.1 STM32F103RCT6.20 | length 76.2
  Top Layer w0.2: EN_CH0.1@70.31,11.81 72.69,11.81 R43.1@72.75,11.75 ; v1(77.1,31.7) 78.5,33.1 78.5,45.133 86.1,52.733 86.1,66.45 87.15,67.5 STM32F103RCT6.20@87.2,67.5
  Bottom Layer w0.2: C74.1@67.75,8.85 67.77,8.87 67.77,11.81 67.77,11.98 EN_CH0.2@67.75,12 ; EN_CH0.1@70.31,11.81 70.71,11.81 77.1,18.2 v1(77.1,31.7)
  Bottom Layer w0.5: EN_CH0.4@62.69,11.81 65.23,11.81 67.77,11.81 EN_CH0.1@70.31,11.81
EN_CH1: C78.1 EN_CH1.1 EN_CH1.2 EN_CH1.3 EN_CH1.4 R47.1 STM32F103RCT6.19 | length 73.1
  Top Layer w0.2: v1(78.3,31.7) 81.1,34.5 81.1,45.9 87.35,52.15 87.35,65.15 STM32F103RCT6.19@87.3,65.2 ; EN_CH1.1@92.31,11.81 95.19,11.81 R47.1@95.25,11.75
  Bottom Layer w0.2: v1(78.3,31.7) 78.3,18.2 EN_CH1.4@84.69,11.81 ; C78.1@89.75,8.85 89.77,8.87 89.77,11.48 EN_CH1.2@89.75,11.5
  Bottom Layer w0.5: EN_CH1.4@84.69,11.81 EN_CH1.3@87.23,11.81 EN_CH1.2@89.77,11.81 EN_CH1.1@92.31,11.81
FUNC_A: C83.1 FUNC.A R52.1 STM32F103RCT6.51 | length 90.7
  Top Layer w0.2: R52.1@158.5,15.9 FUNC.A@158.5,18
  Bottom Layer w0.2: STM32F103RCT6.51@92.5,41.9 92.83,41.9 93.83,40.9 152.2,40.9 160.9,32.2 160.9,28.9 161.9,27.9 162,27.9 162,21.75 158.5,18.25 FUNC.A@158.5,18
FUNC_B: C84.1 FUNC.B R54.1 STM32F103RCT6.52 | length 92.6
  Top Layer w0.2: R54.1@163.5,15.9 FUNC.B@163.5,18
  Bottom Layer w0.2: STM32F103RCT6.52@92.4,44.4 92.87,44.4 93.77,43.5 98.3,43.5 100.4,41.4 152.5,41.4 163.1,30.8 163.1,28.7 163.9,27.9 C84.1@164.25,27.9 ; FUNC.B@163.25,18 163.303,18 164.25,18.947 C84.1@164.25,28.15
FUNC_ENC: C85.2 FUNC.D R53.1 STM32F103RCT6.49 | length 79.2
  Bottom Layer w0.2: STM32F103RCT6.49@89.7,42 90.19,42 91.79,40.4 151.9,40.4 158.5,33.8 FUNC.D@158.5,32.5 ; R53.1@157.5,29.5 157.6,29.4 158.1,29.4 159.35,28.15 C85.2@159.75,28.15 ; R53.1@157.5,29.9 157.5,31.5 158.25,32.25 FUNC.D@158.5,32.25
GND: "BUFF+_Channel 0.9" "BUFF+_Channel 1.9" "BUFF-_Channel 0.9" "BUFF-_Channel 1.9" "C29_Channel 0.2" "C29_Channel 1.2" "C30_Channel 0.2" "C30_Channel 1.2" "C31_Channel 0.2" "C31_Channel 1.2" "C32_Channel 0.2" "C32_Channel 1.2" "C33_Channel 0.2" "C33_Channel 1.2" "C34_Channel 0.2" "C34_Channel 1.2" "C35_Channel 0.1" "C35_Channel 1.1" "C36_Channel 0.1" "C36_Channel 1.1" "C37_Channel 0.1" "C37_Channel 1.1" "C38_Channel 0.1" "C38_Channel 1.1" "C39_Channel 0.1" "C39_Channel 1.1" "C40_Channel 0.1" "C40_Channel 1.1" "C41_Channel 0.2" "C41_Channel 1.2" "C42_Channel 0.2" "C42_Channel 1.2" "C59_Channel 0.2" "C59_Channel 1.2" "C60_Channel 0.2" "C60_Channel 1.2" "C61_Channel 0.2" "C61_Channel 1.2" "R6_Channel 0.1" "R6_Channel 1.1" "R20_Channel 0.1" "R20_Channel 1.1" "R21_Channel 0.1" "R21_Channel 1.1" "R30_Channel 0.2" "R30_Channel 1.2" "VT1_Channel 0.2" "VT1_Channel 1.2" "VT2_Channel 0.2" "VT2_Channel 1.2" "VT3_Channel 0.2" "VT3_Channel 1.2" C1.2 C2.2 C3.2 C4.2 C5.2 C6.2 C7.2 C8.2 C9.2 C10.2 C11.2 C12.2 C13.2 C14.2 C15.2 C16.2 C17.2 C18.2 C19.1 C20.1 C21.1 C22.1 C23.2 C24.2 C25.2 C26.2 C27.1 C28.1 C62.2 C63.2 C64.2 C65.2 C66.2 C67.2 C68.2 C69.1 C70.2 C71.2 C72.2 C73.1 C74.2 C75.2 C76.2 C77.1 C78.2 C79.2 C80.2 C81.1 C82.2 C83.2 C84.2 C85.1 CURSOR.5 CURSOR.6 CURSOR.7 CURSOR.8 DA1.1 DA1.4 DA1.9 DA1.12 DA1.16 DA1.27 DA1.29 DA1.32 DA1.34 DA1.45 DA2.1 DA2.4 DA2.9 DA2.12 DA2.16 DA2.27 DA2.29 DA2.32 DA2.34 DA2.45 EN_CH0.5 EN_CH0.6 EN_CH0.7 EN_CH0.8 EN_CH1.5 EN_CH1.6 EN_CH1.7 EN_CH1.8 FUNC.C FUNC.E LED_RUN.2 MENU_BACK.5 MENU_BACK.6 MENU_BACK.7 MENU_BACK.8 P1.5 pad.6@13.6,132.9 pad.6@41.9,132.9 R33.2 RUN_STOP.5 RUN_STOP.6 RUN_STOP.7 RUN_STOP.8 SET_CH0.C SET_CH0.E SET_CH1.C SET_CH1.E STM32F103RCT6.28 STM32F103RCT6.55 SW_POWER.1 SW_POWER.4 TIME.C TIME.E TRG.C TRG.E TRG_MODE.5 TRG_MODE.6 TRG_MODE.7 TRG_MODE.8 U1.2 U1.5 XS1.2 XS1.37 XS1.38 Z1.2 | length 167.5
  Top Layer w0.5: 16.7,108 16.85,107.85 18.3,107.85 19.1,107.05 19.2,107.05 ; 45.2,118.65 45.3,118.55 45.3,116.35 ; 48.1,108.1 49.1,108.1 50,107.2 50.05,107.2 50.2,107.05
  Top Layer w1: XS1.38@62.29,83.51 XS1.38@62.4,83.4
  Bottom Layer w0.2: 5,97.2 5.2,97.4 7.5,97.4 7.6,97.5 ; 7.8,97.7 7.9,97.7 8.5,98.3 19,98.3 19.7,97.6 19.7,97.5 ; 20.075,97.275 20.2,97.4 22.5,97.4 ; 33.4,97.2 35.8,97.2 36,97.4 ; 36,97.5 36.7,98.2 47.5,98.2 47.8,97.9 47.85,97.9 47.9,97.85 47.9,97.5 ; 48.5,97.4 51,97.4 ; C77.1@65.25,29.85 65.3,29.9 v1(65.3,30.9) ; C75.2@67.5,29.85 v1(67.5,30.9) ; EN_CH0.7@67.75,4.25 67.77,4.27 67.77,7.13 C74.2@67.75,7.15 ; v1(68.075,96.85) DA2.16@69.55,96.85 ; v1(69.7,30.9) 69.7,29.9 C76.2@69.75,29.85 ; v1(70.55,100.7) 70.55,100.2 70.75,100 71.014,100 71.1,99.914 DA2.12@71.1,99.9 ; DA2.27@72.1,91.3 72.1,90.4 v1(73.5,89) ; DA2.9@72.55,99.9 72.55,101.95 72.6,102 73,102 ; C18.2@72.95,102.6 72.95,102.95 73.9,103.9 v1(73.9,104.8) ; DA2.29@73.1,91.3 73.1,90.35 74.45,89 v1(74.5,89) ; DA2.32@74.6,91.3 74.6,89.9 v1(75.5,89) ; DA2.4@75.05,99.15 75.35,98.85 76.3,98.85 76.514,99.064 76.514,99.814 76.6,99.9 77.25,99.9 v1(77.25,100.7) ; DA2.34@75.55,91.25 75.6,91.3 75.6,89.95 76.5,89.05 v1(76.5,89) ; DA2.45@78.2,96.8 78.15,96.85 79.55,96.85 v1(79.6,96.8) ; C81.1@87.25,29.85 87.3,29.9 v1(87.3,30.9) ; v1(88.325,96.85) DA1.16@89.8,96.85 ; C79.2@89.5,29.85 v1(89.5,30.9) ; EN_CH1.7@89.75,4.25 89.77,4.27 89.77,7.13 C78.2@89.75,7.15 ; v1(90.8,100.7) 90.8,100.2 91,100 91.264,100 91.35,99.914 DA1.12@91.35,99.9 ; v1(91.7,30.9) 91.7,29.9 C80.2@91.75,29.85 ; DA1.27@92.35,91.3 92.35,90.4 v1(93.75,89) ; DA1.9@92.825,99.175 93.125,98.875 95.075,98.875 95.35,99.15 95.65,98.85 96.55,98.85 96.764,99.064 96.764,99.814 DA1.1@96.85,99.9 97.5,99.9 v1(97.5,100.7) ; DA1.9@92.85,99.9 92.85,101.025 92.7,101.175 92.7,102.054 93.046,102.4 C17.2@93.2,102.4 ; C17.2@93.25,102.8 93.506,103.056 93.506,103.906 v1(93.8,104.2) ; DA1.29@93.35,91.3 93.35,90.35 94.7,89 v1(94.75,89) ; DA1.32@94.85,91.3 94.85,89.9 v1(95.75,89) ; DA1.34@95.8,91.25 DA1.34@95.85,91.3 95.85,89.95 96.75,89.05 v1(96.75,89) ; DA1.45@98.4,96.85 98.45,96.8 98.5,96.85 v1(99.8,96.85) ; C73.1@112.75,29.85 112.8,29.9 v1(112.8,30.9) ; C71.2@115,29.85 v1(115,30.9) ; CURSOR.7@115.25,4.25 115.27,4.27 115.27,7.13 C70.2@115.25,7.15 ; v1(117.2,30.9) 117.2,29.9 C72.2@117.25,29.85 ; C69.1@134.75,29.85 134.8,29.9 v1(134.8,30.9) ; C67.2@137,29.85 v1(137,30.9) ; TRG_MODE.7@137.25,3.75 137.27,3.77 137.27,7.13 C65.2@137.25,7.15 ; v1(139.2,30.9) 139.2,29.9 C68.2@139.25,29.85 ; C85.1@159.75,29.65 159.8,29.7 v1(159.8,30.7) ; C83.2@162,29.65 v1(162,30.7) ; MENU_BACK.7@162.25,4.5 162.27,4.52 162.27,7.13 C82.2@162.25,7.15 ; v1(164.2,30.7) 164.2,29.7 C84.2@164.25,29.65 ; C66.2@183.25,15.75 183.27,15.77 RUN_STOP.7@185.81,15.77
  Bottom Layer w0.5: 16,103 16,102.9 19.9,99 19.9,97.5 ; 19.9,97.35 20,97.35 ; 45.1,102.3 48.5,98.9 48.5,97.4 48.5,97.35 ; XS1.2@108,83 XS1.2@108.2,82.8 ; 109.475,79.175 110.2,79.9 112.07,79.9 113,78.97 C26.2@113,76.2 ; C26.2@112.8,75.6 C26.2@112.9,75.7 ; C28.1@129.4,73.4 129.4,73.5 129.5,73.6 129.5,74.6 130.5,75.6 U1.5@130.52,75.6 ; C27.1@129.4,77.4 129.5,77.3 129.5,76.7 130.52,75.68 U1.5@130.52,75.62 ; C24.2@131.6,73.7 131.5,73.8 131.5,74.5 130.52,75.48 U1.5@130.52,75.6 ; C23.2@131.7,77.5 131.5,77.3 131.5,76.6 U1.5@130.52,75.62 ; SW_POWER.1@186.2,92 186,91.8 186,91.3 186.5,90.8 187.025,90.8 SW_POWER.4@187.125,90.7 ; SW_POWER.4@187.1,98.1 SW_POWER.4@189.45,98.1 ; 187.4,90.7 SW_POWER.4@189.45,90.7 ; U1.5@130.52,75.6 U1.5@130.52,75.62
  Bottom Layer w1: XS1.38@62.2,83.4 62.29,83.49 XS1.37@62.29,85.79
  other v1: 62.5,7 70,7 77.5,7 85,7 95,7 102.5,7 110,7 117.5,7 125,7 132.5,7 142.5,7 150,7 157.5,7 165,7 170,7 177.5,7 61,22 185,22 185,27 61,33 185,34.5 62.5,39.5 185,42 62.5,47 62.5,54.5 185,56.5 62.5,62 185,64.75 62.5,69.5 110,72 119,72 124,72 130,72 181,72 62.5,77 70,77 77.5,77 85,77 92.5,77 100,77 142.5,77 150,77 136,77.2 187.5,80.6 150,83 187.5,85 187.5,88.9 150,89.5 150,97 157.5,97 165,97 172,99 181.1,99.1 25,103 44.5,103.5 13.5,104 25,106 32,106 44.5,106.5 13.5,107 44.5,109.4 25,109.5 32,109.5 55,110 47.1,110.2 40.1,111 3.5,113 8.5,113 18.5,113 23.5,113 32,113 36,113 40,113 49,113 52,113 55,113 10.7,135.8 16,136 60,136 54.7,136.1 36.7,136.5 41.8,136.6 47.2,136.6 24.8,136.8 14,138.9 8,139 4,139.5 60,140 38,140.5 43.5,140.5 49,140.5 5.5,141.5 10.4,142.5 49,143.5 44.2,143.6 5,144.5 28.5,144.5 60,144.5 53,147.7 45,149 60,149 3,151 10,153.5 20,153.5 25,153.5 30,153.5 35,153.5 40,153.5 45,153.5 50,153.5 60,153.5